# EAGLE board pic32mk (EAGLE 9.6.0)
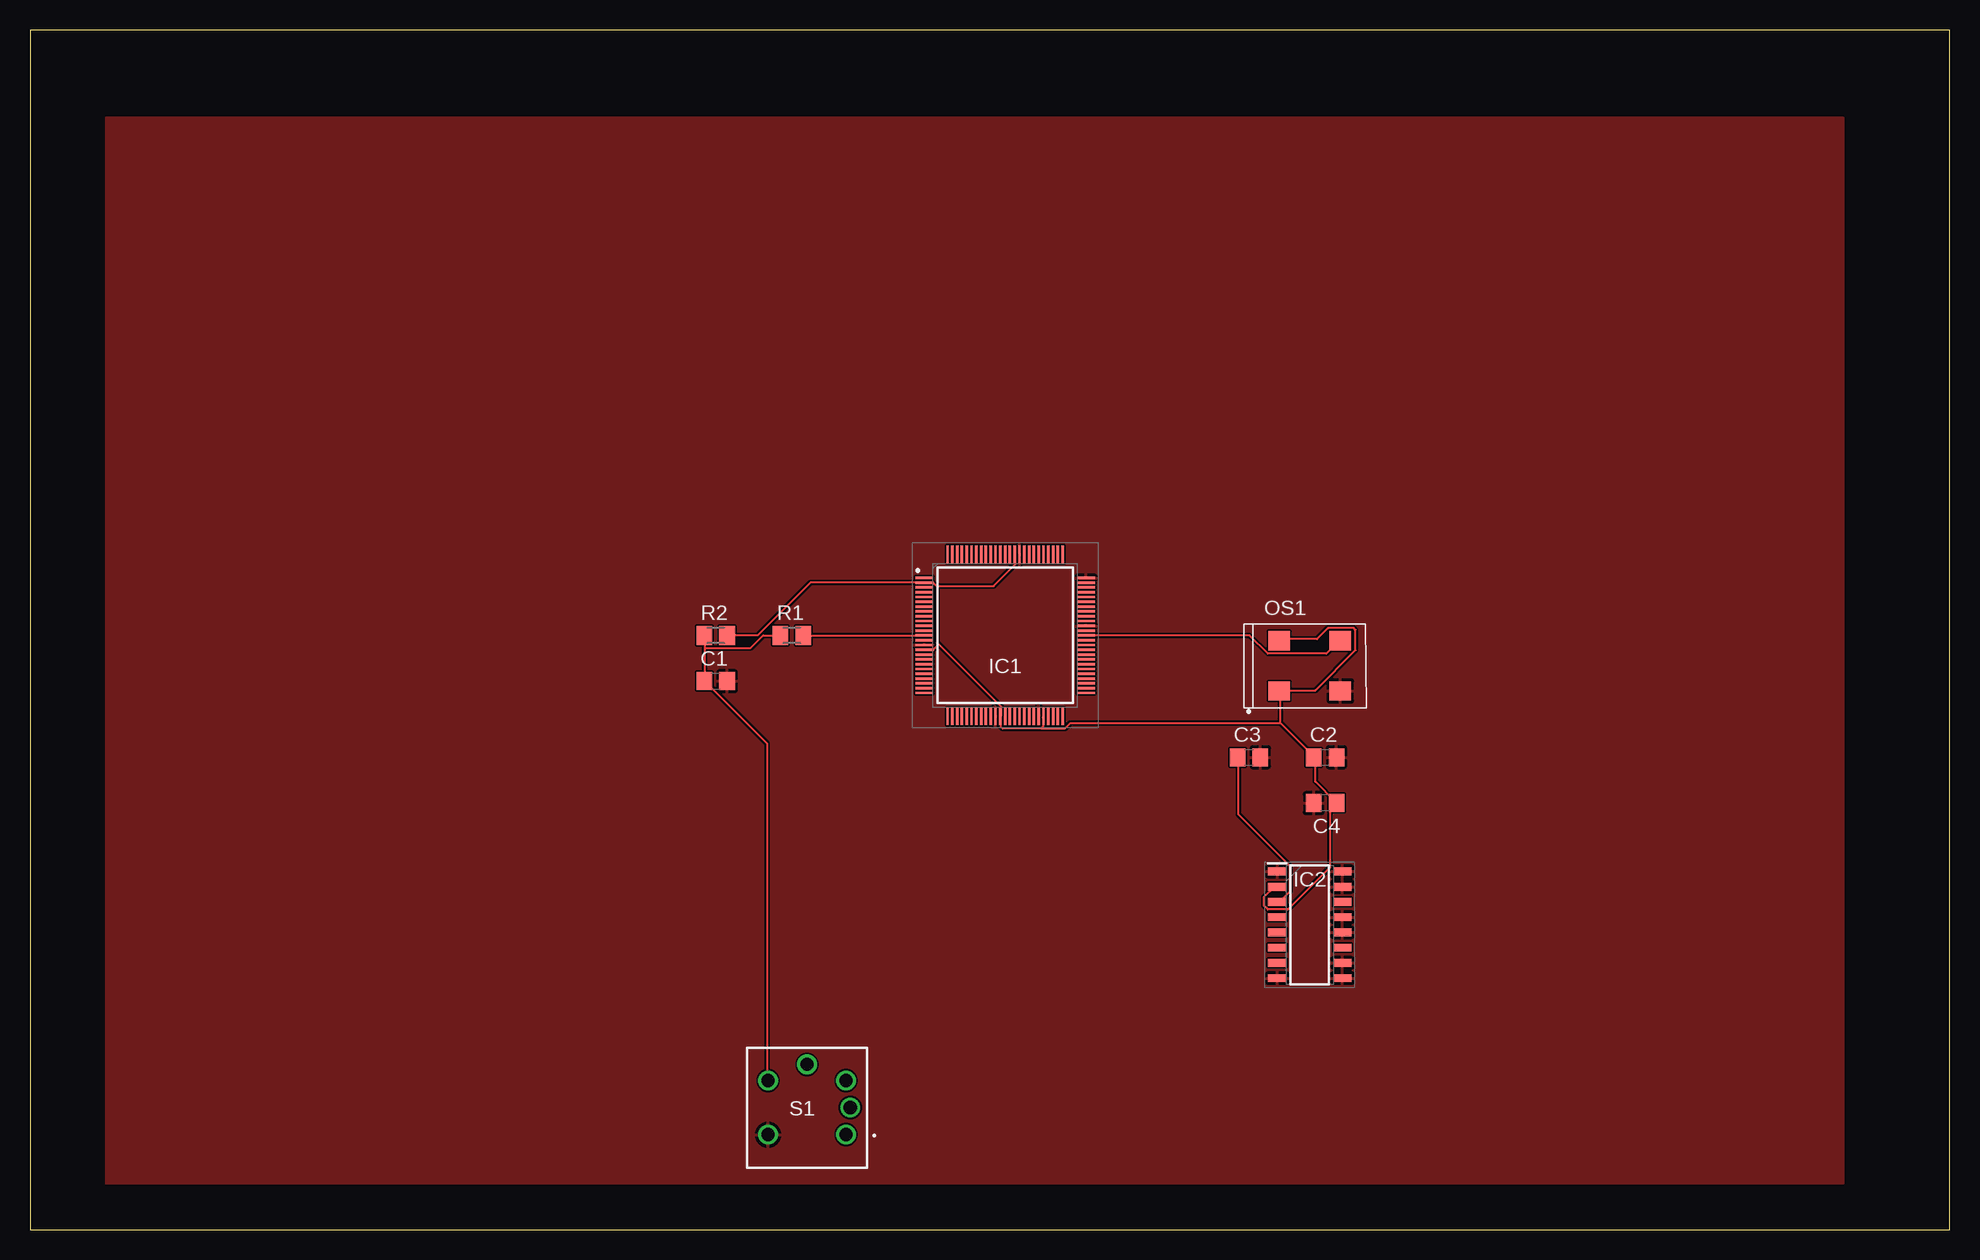
[diagram p0: board, top side]

Size 160 x 100 mm. Coordinates in mm from the lower left corner, seen from the top.
Outline: 0,0 160,0 160,100 0,100 0,0
Copper layers (1*16): Top 0.035mm / dielectric 1.5mm / Bottom 0.035mm
Design rules "default": minimum track width 6mil, minimum drill 0.35mm, track to track 6mil, track to pad 6mil, pad to pad 6mil, via to via 6mil, smd to smd 6mil, copper to edge 40mil, drill to drill 6mil, minimum pad ring 10mil, minimum via ring 8mil, stop-mask expansion 4mil, vias tented up to drill 0mil, thermal gap 10mil

## Footprints (pad centres in the part's own frame; a part is rotated, then mirrored left to right if it is on the bottom)
C0805 = smd 1.3 x 1.5: 1 -0.95,0; 2 0.95,0
QFP40P1400X1400X120-100N = smd 1.475 x 0.2: 1 -6.738,4.8; 2 -6.738,4.4; 3 -6.738,4; 4 -6.738,3.6; 5 -6.738,3.2; 6 -6.738,2.8; 7 -6.738,2.4; 8 -6.738,2; 9 -6.738,1.6; 10 -6.738,1.2; 11 -6.738,0.8; 12 -6.738,0.4; 13 -6.738,0; 14 -6.738,-0.4; 15 -6.738,-0.8; 16 -6.738,-1.2; 17 -6.738,-1.6; 18 -6.738,-2; 19 -6.738,-2.4; 20 -6.738,-2.8; 21 -6.738,-3.2; 22 -6.738,-3.6; 23 -6.738,-4; 24 -6.738,-4.4; 25 -6.738,-4.8; 51 6.738,-4.8; 52 6.738,-4.4; 53 6.738,-4; 54 6.738,-3.6; 55 6.738,-3.2; 56 6.738,-2.8; 57 6.738,-2.4; 58 6.738,-2; 59 6.738,-1.6; 60 6.738,-1.2; 61 6.738,-0.8; 62 6.738,-0.4; 63 6.738,0; 64 6.738,0.4; 65 6.738,0.8; 66 6.738,1.2; 67 6.738,1.6; 68 6.738,2; 69 6.738,2.4; 70 6.738,2.8; 71 6.738,3.2; 72 6.738,3.6; 73 6.738,4; 74 6.738,4.4; 75 6.738,4.8 | smd 0.2 x 1.475: 26 -4.8,-6.738; 27 -4.4,-6.738; 28 -4,-6.738; 29 -3.6,-6.738; 30 -3.2,-6.738; 31 -2.8,-6.738; 32 -2.4,-6.738; 33 -2,-6.738; 34 -1.6,-6.738; 35 -1.2,-6.738; 36 -0.8,-6.738; 37 -0.4,-6.738; 38 0,-6.738; 39 0.4,-6.738; 40 0.8,-6.738; 41 1.2,-6.738; 42 1.6,-6.738; 43 2,-6.738; 44 2.4,-6.738; 45 2.8,-6.738; 46 3.2,-6.738; 47 3.6,-6.738; 48 4,-6.738; 49 4.4,-6.738; 50 4.8,-6.738; 76 4.8,6.738; 77 4.4,6.738; 78 4,6.738; 79 3.6,6.738; 80 3.2,6.738; 81 2.8,6.738; 82 2.4,6.738; 83 2,6.738; 84 1.6,6.738; 85 1.2,6.738; 86 0.8,6.738; 87 0.4,6.738; 88 0,6.738; 89 -0.4,6.738; 90 -0.8,6.738; 91 -1.2,6.738; 92 -1.6,6.738; 93 -2,6.738; 94 -2.4,6.738; 95 -2.8,6.738; 96 -3.2,6.738; 97 -3.6,6.738; 98 -4,6.738; 99 -4.4,6.738; 100 -4.8,6.738
SOIC127P600X175-16N = smd 1.525 x 0.65: 1 -2.712,4.445; 2 -2.712,3.175; 3 -2.712,1.905; 4 -2.712,0.635; 5 -2.712,-0.635; 6 -2.712,-1.905; 7 -2.712,-3.175; 8 -2.712,-4.445; 9 2.712,-4.445; 10 2.712,-3.175; 11 2.712,-1.905; 12 2.712,-0.635; 13 2.712,0.635; 14 2.712,1.905; 15 2.712,3.175; 16 2.712,4.445
7.2X5.2-4-PAD = smd 1.8 x 1.6: 1 -2.54,-2.1; 2 2.54,-2.1; 3 2.54,2.1; 4 -2.54,2.1
M0805 = smd 1.3 x 1.6: 1 -0.95,0; 2 0.95,0
B3W-9_1-LED = drill 1.1 pad 1.65: 1 3.25,-2.25; 2 -3.25,-2.25; 3 3.25,2.25; 4 -3.25,2.25; 5 0,3.6; 6 3.6,0

## Placement (x,y rotation side)
C1  0.1  [C0805]  57.15,45.72 0 top
C2  0.1  [C0805]  107.95,39.37 0 top
C3  0.1  [C0805]  101.6,39.37 0 top
C4  0.1  [C0805]  107.95,35.56 180 top
IC1  PIC32MK1024MCF100-I_PT  [QFP40P1400X1400X120-100N]  81.28,49.53 0 top
IC2  ADM3095EBRZ  [SOIC127P600X175-16N]  106.68,25.4 0 top
OS1  OSC-OE-CFPS-32  [7.2X5.2-4-PAD]  106.68,46.99 0 top
R1  1k  [M0805]  63.5,49.53 0 top
R2  10k  [M0805]  57.15,49.53 0 top
S1  B3W-9000-Y1N  [B3W-9_1-LED]  64.77,10.16 0 top

## Library data of the parts
C1-C4 = rcl; SPICEPREFIX: C
IC1 = PIC32MK1024MCF100-I_PT; DESCRIPTION: Microchip Technology MCU32, 120MHz, 4 I2C, 6 I2S, USB FS, CAN 2.0B, 12-bit ADC, Motor Control; HEIGHT: 1.2mm; MANUFACTURER_NAME: Microchip; MANUFACTURER_PART_NUMBER: PIC32MK1024MCF100-I/PT; MOUSER_PART_NUMBER: 579-2MK1024MCF100IPT; MOUSER_PRICE-STOCK: https://www.mouser.com/Search/Refine.aspx?Keyword=579-2MK1024MCF100IPT; RS_PART_NUMBER: 1449608P; RS_PRICE-STOCK: http://uk.rs-online.com/web/p/products/1449608P
IC2 = SamacSys_Parts; DESCRIPTION: Level 4 EMC Protected RS-485 Transceiver with Full +/-42 V Fault Protection; HEIGHT: 1.75mm; MANUFACTURER_NAME: Analog Devices; MANUFACTURER_PART_NUMBER: ADM3095EBRZ; MOUSER_PART_NUMBER: 584-ADM3095EBRZ; MOUSER_PRICE-STOCK: https://www.mouser.com/Search/Refine.aspx?Keyword=584-ADM3095EBRZ
OS1 = IQD-Frequency-Products
R1 R2 = rcl; SPICEPREFIX: R
S1 = B3W-9000-Y1N; ALLIED_NUMBER: 70176005; ALLIED_PRICE-STOCK: https://www.alliedelec.com/omron-electronic-components-b3w-9000-y1n/70176005/; DESCRIPTION: Illuminated Tactile Switches Illuminated Ylw LED White Cap; HEIGHT: mm; MANUFACTURER_NAME: Omron Electronics; MANUFACTURER_PART_NUMBER: B3W-9000-Y1N; MOUSER_PART_NUMBER: 653-B3W-9000-Y1N; MOUSER_PRICE-STOCK: https://www.mouser.com/Search/Refine.aspx?Keyword=653-B3W-9000-Y1N

## Nets
+5V: C3.1 IC2.3
N$1: C1.1 R1.1 R2.1 S1.4
N$2: IC1.13 R1.2
N$3: IC1.63 OS1.3
VDD: C2.1 C4.1 IC1.2 IC1.16 IC1.37 IC1.46 IC1.86 IC2.2 OS1.1 OS1.4 R2.2
VSS: C1.2 C2.2 C3.2 C4.2 IC1.15 IC1.36 IC1.45 IC1.65 IC1.75 IC1.85 IC2.1 IC2.8 IC2.9 IC2.10 IC2.12 IC2.13 IC2.15 IC2.16 OS1.2 S1.2

## Tracks (layer width: path | path; a pad name or v marks a point on that pad's centre or on a via)
+5V
  Top 0.152: C3.1 100.74,39.32 100.74,34.59 105,30.33 105,28.19 104.09,27.28 IC2.3
N$1
  Top 0.152: 56.24,48.46 56.24,49.53 R2.1 | 56.24,48.46 56.24,45.72 | R1.1 61.11,49.53 60.05,48.46 56.24,48.46 | 56.24,45.72 61.42,40.54 61.42,12.5 S1.4 | 56.24,45.72 C1.1
N$2
  Top 0.152: R1.2 IC1.13
N$3
  Top 0.152: IC1.63 101.65,49.53 103.17,48.01 108.05,48.01 109.12,49.07 OS1.3
VDD
  Top 0.152: IC2.2 103.94,28.5 103.63,28.5 102.87,27.74 102.87,26.98 103.17,26.67 104.85,26.67 108.36,30.18 108.36,35.05 108.81,35.51 C4.1 108.81,35.66 107.14,37.34 107.14,39.32 C2.1 106.98,39.47 104.24,42.22 | 104.24,42.22 104.24,44.81 OS1.1 104.24,44.96 107.14,44.96 110.49,48.31 110.49,49.99 110.34,50.14 108.2,50.14 107.29,49.23 104.24,49.23 OS1.4 | 84.28,41.76 81.08,41.76 80.92,41.91 80.92,42.67 IC1.37 80.92,42.82 80.92,43.59 75.59,48.92 | 84.28,41.76 84.43,41.91 84.43,42.67 IC1.46 | 75.59,53.65 75.59,48.92 | 75.59,48.92 75.59,48.62 75.29,48.31 74.68,48.31 IC1.16 | 75.59,53.65 75.29,53.95 74.68,53.95 IC1.2 74.52,53.95 65.08,53.95 60.66,49.53 R2.2 | 75.59,53.65 80.31,53.65 82.14,55.47 82.14,56.24 IC1.86 | 104.24,42.22 86.72,42.22 86.26,41.76 84.28,41.76
VSS
  pour Top: 6.35,92.71 151.13,92.71 151.13,3.81 6.35,3.81